# Altium PCB Pioneer V2.0.pcbdoc
Units mil, origin at the board's own origin, x right, y up, seen from the top; angles counter-clockwise.
Board outline 2175 x 1010 mil, 2 copper layers (Top Layer, Bottom Layer); 37 components, 45 nets, 154 pads, 50 vias.
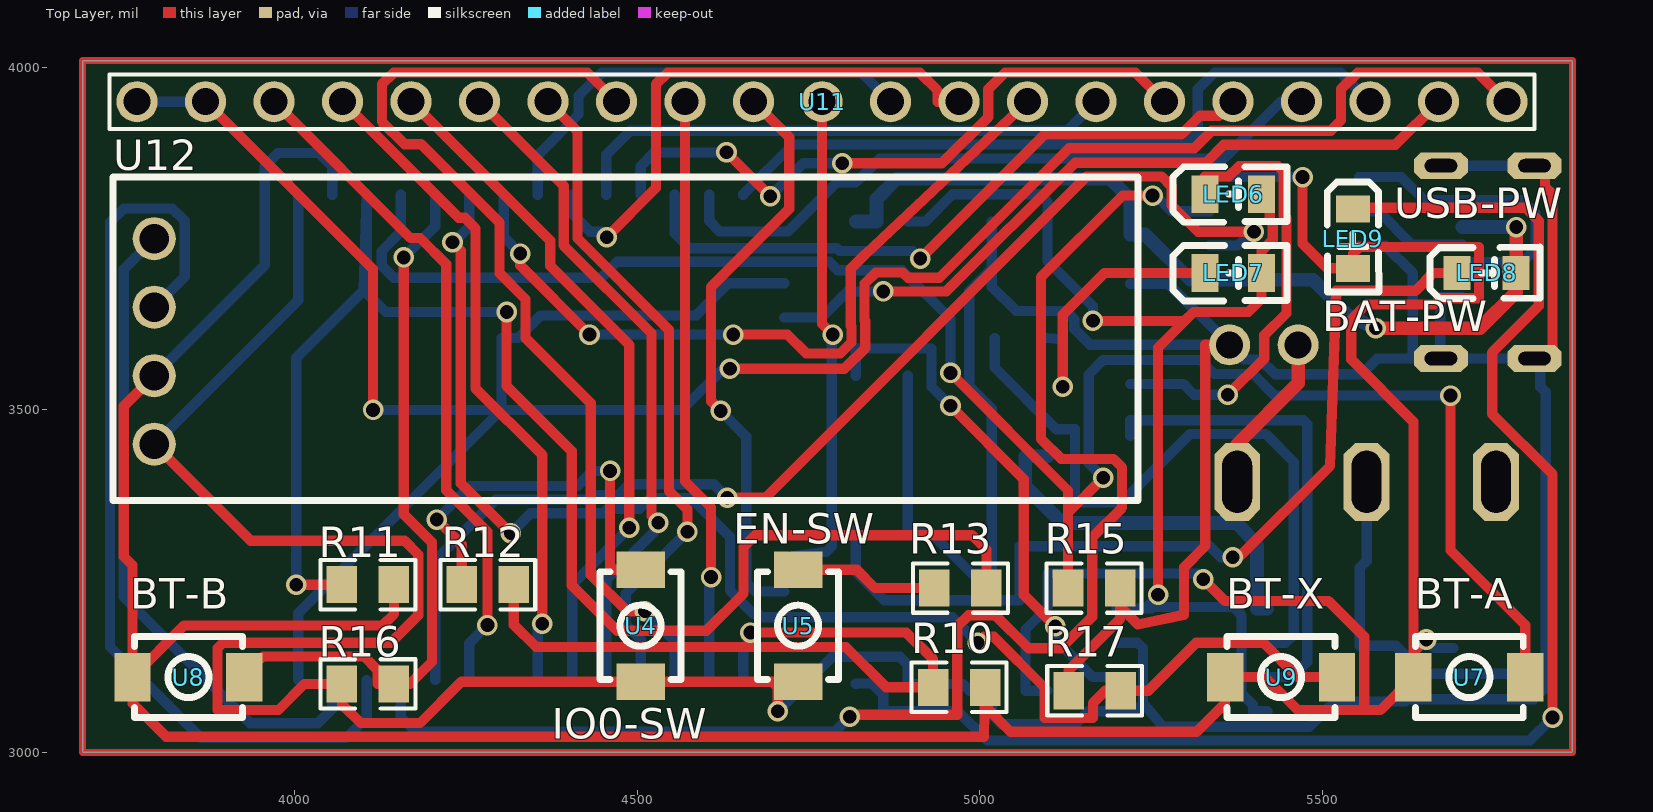
[diagram p0: Top Layer view]
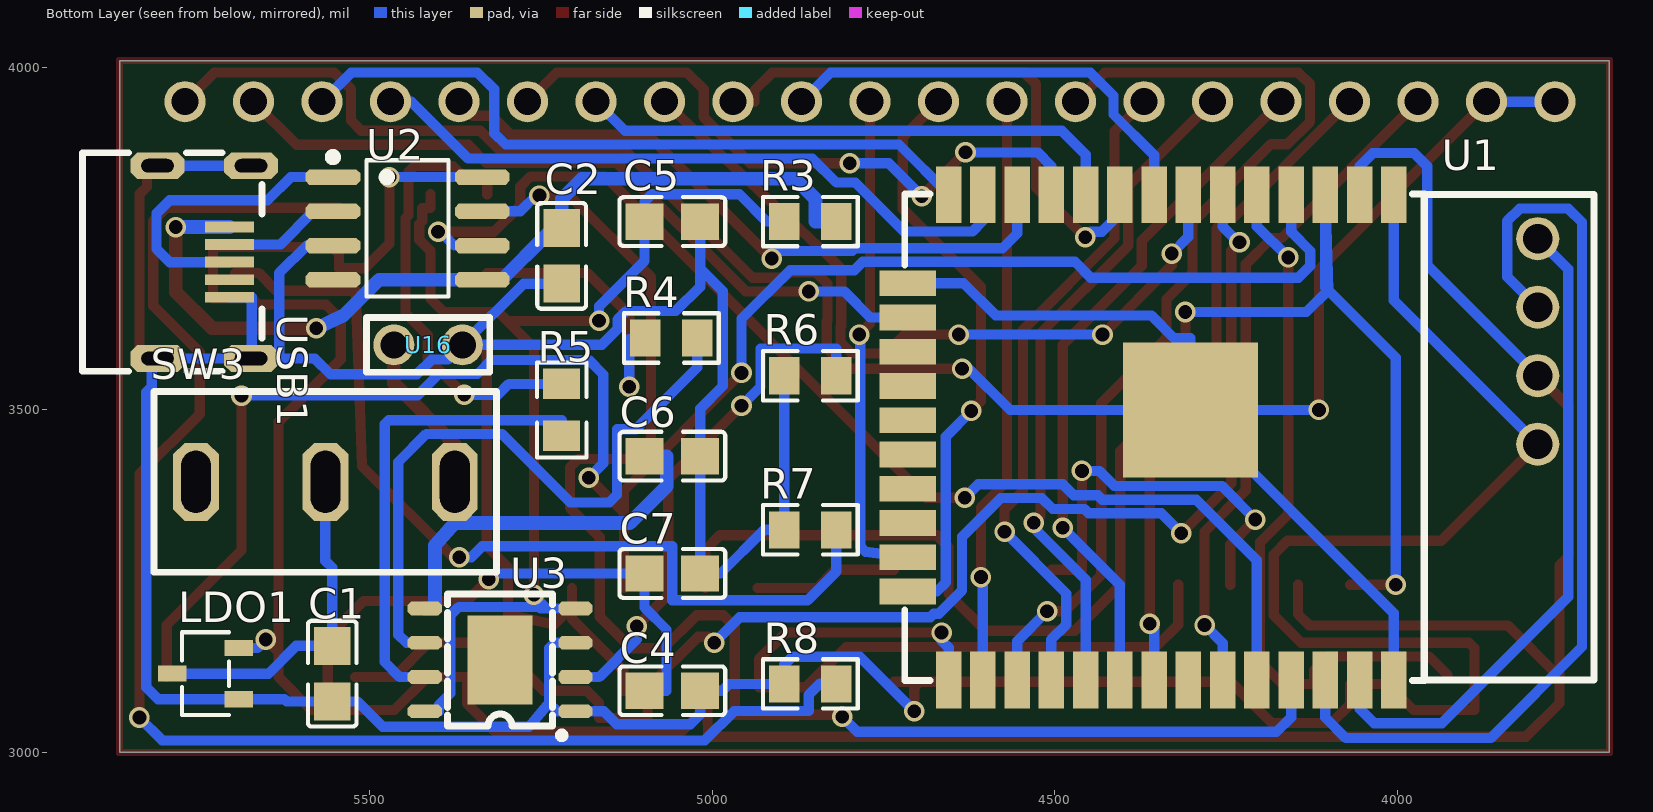
[diagram p1: Bottom Layer view, seen from below]

## Layer stack, top to bottom
Top Solder: solder mask 0.4, Solder Resist, Dk 3.5
Top Layer: signal copper 1.4
Dielectric 1: dielectric 12.6, FR-4, Dk 4.8
Bottom Layer: signal copper 1.4
Bottom Solder: solder mask 0.4, Solder Resist, Dk 3.5

## Board outline
3690,3000 5865,3000 5865,4010 3690,4010

## Design rules (kind name [scope] priority, off if disabled: settings)
Clearance [All] p1: gap=5 ignorepadtopadclearanceinfootprint=FALSE
MinimumSolderMaskSliver [All] p1: minsoldermaskwidth=5
PolygonConnect [All] p1: connectstyle=Relief reliefconductorwidth=10 reliefentries=4 polygonreliefangle="90 Angle" airgapwidth=10
RoutingVias [All] p1: holewidth=20 width=30 viastyle="Through Hole" minholewidth=20 minwidth=30 maxholewidth=20 maxwidth=30
SilkToSilkClearance [All] p1: silktosilkclearance=0
SilkToSolderMaskClearance [IsPad] p1: minsilkscreentomaskgap=1 clearancetoexposedcopper=TRUE
SolderMaskExpansion [All] p1: expansion=4
Width "Power 5" [InNet('5VCC')] p1: maxlimit=20 minlimit=15 preferedwidth=20
Width "Power bat" [InNet('BAT-VCC')] p2: maxlimit=20 minlimit=15 preferedwidth=20
Width "Power 3.3" [InNet('3.3VCC')] p3: maxlimit=15 minlimit=10 preferedwidth=15
Width [All] p4: maxlimit=15 minlimit=10 preferedwidth=15
27 further rules are at their usual default settings.

## Components (designator, comment, footprint, x,y, rotation, side; value= is the part's Value field where it differs from the comment)
C1 "" C0805 5554.55,3115 r90 bottom
C2 "" C0805 5219.55,3725 r270 bottom
C4 "" C0805 5058.04,3090 r180 bottom
C5 "" C0805 5058.04,3775 r180 bottom
C6 "" C0805 5058.04,3432.5 r180 bottom
C7 "" C0805 5058.04,3261.25 r180 bottom
LDO1 "" SOT-23-3_L2.9-W1.6-P1.90-LS2.8-BR 5739.55,3115 r180 bottom
LED6 "" LED0805-R-RD 5369.55,3815 r0 top
LED7 "" LED0805-R-RD 5369.55,3700 r0 top
LED8 "USB-PW" LED0805-RD_RED 5739.55,3700 r0 top
LED9 "BAT-PW" LED0805-RD_RED 5544.55,3750 r270 top
R3 "" R0805 4856.55,3775 r180 bottom
R4 "" R0805 5059.55,3605 r180 bottom
R5 "" R0805 5219.55,3500 r270 bottom
R6 "" R0805 4856.55,3550 r180 bottom
R7 "" R0805 4856.55,3325 r180 bottom
R8 "" R0805 4856.55,3100 r180 bottom
R10 "" R0805 4969.55,3095 r0 top
R11 "" R0805 4106.55,3245 r0 top
R12 "" R0805 4281.55,3245 r0 top
R13 "" R0805 4971.55,3240 r0 top
R15 "" R0805 5166.55,3240 r180 top
R16 "" R0805 4106.55,3100 r0 top
R17 "" R0805 5167.55,3090 r0 top
SW3 "" SW-TH_SHOU-HAN_SS12D10G4 5564.55,3395 r180 bottom
U1 "" WIFIM-SMD_39P-L25.5-W18.0-P1.27-BL 4359.55,3460 r0 bottom
U2 "" SOP-8_L5.0-W4.0-P1.27-LS6.0-BL 5444.55,3765 r270 bottom
U3 "" SOP-8_L4.9-W3.9-P1.27-LS6.0-TL-EP-1 5309.55,3135 r0 bottom
U4 "IO0-SW" SW-SMD_L4.0-W3.0-LS4.8-1 4504.55,3185 r90 top
U5 "EN-SW" SW-SMD_L4.0-W3.0-LS4.8-1 4734.55,3185 r90 top
U7 "BT-A" SW-SMD_L4.0-W3.0-LS4.8-1 5714.55,3110 r180 top
U8 "BT-B" SW-SMD_L4.0-W3.0-LS4.8-1 3844.55,3110 r180 top
U9 "BT-X" SW-SMD_L4.0-W3.0-LS4.8-1 5439.55,3110 r180 top
U11 "" "ESP32 Pioneer OUT PIN20" 3669.55,4065 r0 top
U12 "" ? 3774.55,3670 r0 top
U16 "" "Battery Pin" 5524.55,3555 r90 bottom
USB1 "" MICRO-USB 5741.25,3715.8 r270 bottom

## Footprints (in the part's own frame and the unit in brackets; to place one, negate y for a bottom-side part, rotate by r counter-clockwise, add the part's x,y. Pads: shape width x height; smd on the part's side, far side on the other; paste and mask are expansions set on the pad)
"Battery Pin" [mil]
  round 60 hole 39.37 mask+0: 1(40,-60) 2(40,-160)
  silkscreen extent 0,-200 80,-20
C0805 [mil]
  rect 55.5x53.2 smd mask+2: 1(-40.5,0) 2(40.6,0)
  silkscreen extent -77,-36 77,36
"ESP32 Pioneer OUT PIN20" [mil]
  round 60 hole 39.37 mask+0: 1(100,-115) 2(200,-115) 3(300,-115) 4(400,-115) 5(500,-115) 6(600,-115) 7(700,-115) 8(800,-115) 9(900,-115) 10(1000,-115) 11(1100,-115) 12(1200,-115) 13(1300,-115) 14(1400,-115) 15(1500,-115) 16(1600,-115) 17(1700,-115) 18(1800,-115) 19(1900,-115) 20(2000,-115) 21(2100,-115)
  silkscreen extent 60,-155 2140,-75
LED0805-R-RD [mil]
  rect 39.4x55.1 smd mask+2: 1(41.4,0) 2(-41.3,0)
  silkscreen extent -88,-41 78,40
LED0805-RD_RED [mil]
  rect 39.4x49.2 smd mask+2: 1(-43.3,0) 2(43.3,0)
  silkscreen extent -83,-37 78,38
MICRO-USB [mil]
  oct 39.4x78.7 hole 19.7 slot 47.2 at 90 deg mask+2: 0(-140.7,-68.3) 0(-140.7,68.3) 0(140.8,-68.3) 0(140.8,68.3)
  rect 15.7x70.9 smd mask+2: 1(-51.2,36.8) 2(-25.6,36.8) 3(0,36.8) 4(25.6,36.8) 5(51.2,36.8)
  silkscreen extent -160,-178 159,84
R0805 [mil]
  rect 44.6x54.2 smd mask+2: 1(-38,0) 2(38,0)
  silkscreen extent -69,-36 69,36
SOP-8_L4.9-W3.9-P1.27-LS6.0-TL-EP-1 [mil]
  oct 50x20 smd mask+1.97: 1(-110,75) 2(-110,25) 3(-110,-25) 4(-110,-75) 5(110,-75) 6(110,-25) 7(110,25) 8(110,75)
  rect 94.5x129.9 smd mask+1.97: 9(0,0)
  silkscreen extent -95,-96 77,115
SOP-8_L5.0-W4.0-P1.27-LS6.0-BL [mil]
  oct 22.6x80.1 smd mask+2: 1(-75,-109) 2(-25,-109) 3(25,-109) 4(75,-109) 5(75,109) 6(25,109) 7(-25,109) 8(-75,109)
  silkscreen extent -110,-115 100,60
SOT-23-3_L2.9-W1.6-P1.90-LS2.8-BR [mil]
  rect 42.1x23.6 smd mask+2: 1(48.6,-37.4) 2(48.6,37.4) 3(-48.6,0)
  silkscreen extent -35,-61 35,61
SW-SMD_L4.0-W3.0-LS4.8-1 [mil]
  rect 53.2x70.9 smd mask+2: 1(-81.7,0) 2(81.7,0)
  silkscreen extent -79,-59 79,59
SW-TH_SHOU-HAN_SS12D10G4 [mil]
  oct 66.9x114.2 hole 43.3 slot 90.6 at 90 deg mask+1.97: 1(-189,0) 2(0,0) 3(189,0)
  silkscreen extent -250,-132 250,132
WIFIM-SMD_39P-L25.5-W18.0-P1.27-BL [mil]
  rect 37.4x82.7 smd mask+2: 1(-354.9,-354.3) 2(-304.9,-354.3) 3(-254.9,-354.3) 4(-204.9,-354.3) 5(-154.9,-354.3) 6(-104.9,-354.3) 7(-54.9,-354.3) 8(-4.9,-354.3) 9(45.1,-354.3) 10(95.1,-354.3) 11(145.1,-354.3) 12(195.1,-354.3) 13(245.1,-354.3) 14(295.1,-354.3) 25(295.1,354.3) 26(245.1,354.3) 27(195.1,354.3) 28(145.1,354.3) 29(95.1,354.3) 30(45.1,354.3) 31(-4.9,354.3) 32(-54.9,354.3) 33(-104.9,354.3) 34(-154.9,354.3) 35(-204.9,354.3) 36(-254.9,354.3) 37(-304.9,354.3) 38(-354.9,354.3)
  rect 82.7x37.4 smd mask+2: 15(354.9,-225) 16(354.9,-175) 17(354.9,-125) 18(354.9,-75) 19(354.9,-25) 20(354.9,25) 21(354.9,75) 22(354.9,125) 23(354.9,175) 24(354.9,225)
  rect 196.9x196.9 smd mask+2: 39(-58,-40)
  silkscreen extent -647,-355 359,355
? [mm]
  round 1.6 hole 1.1 mask+0: 1(0.508,2.032) 2(0.508,-0.508) 3(0.508,-3.048) 4(0.508,-5.588)
  silkscreen extent -1.02,-7.68 36.98,4.32

## Via types
v1: diameter 30, hole 20, Top Layer to Bottom Layer, 50 vias

## Nets (pads, with @x,y where several pads share a name; then routed paths per layer and width w, separated by ;. In a path a pad name is that pad's centre, name@x,y a point inside that pad or via, vN(x,y) a via of type N, cw(c..) or ccw(c..) an arc to the next point about the centre after c; other vN are vias at no path point)
3.3VCC: C4.1 C7.1 LDO1.2 LED9.2 R10.2 R11.2 U1.2 U2.8 U7.2 U8.2 U9.2 U12.3 | length 5852.1
  Top Layer w15: U12.3 3750,3505.45 3750,3286 3762.85,3273.15 U8.2 ; R11.2 4144.55,3201.95 4128,3185.4 3838.25,3185.4 U8.2 ; v1(5326,3253) 5358,3221 5509,3221 5561,3169 5561,3062 ; v1(5471,3840) 5471,3742.7 5507,3706.7 LED9.2 5544.55,3728 5554.55,3738 5728.45,3738 5728.45,3662.9 5671.9,3662.9 5663,3654 5564,3654 5542,3632 5542,3573.85 5632.85,3483 5632.85,3146.15 ; v1(5651.55,3164.85) 5632.85,3146.15 ; U8.2 3762.85,3072 3811.85,3023 5006.05,3023 R10.2 5007.55,3067.45 5044.6,3030.4 5316.25,3030.4 5357.85,3072 U9.2 5416,3110 5464,3062 5561,3062 ; 5561,3062 5584.85,3062 U7.2 5632.85,3146.15
  Bottom Layer w15: U12.3 3956,3711.45 3956,3856 3975,3875 4035.65,3875 4054.65,3856 U1.2 ; C4.1 5066.5,3090 5066.5,3179.46 5098.54,3211.5 C7.1 5317.75,3261.25 v1(5326,3253) ; U2.8 v1(5471,3840) ; v1(5651.55,3164.85) 5664,3152.4 LDO1.2
5VCC: C2.1 LED8.2 R3.2 U2.5 USB1.1 | length 1321.7
  Top Layer w20: v1(5577.65,3619.45) 5730,3619.45 5782.85,3672.3 LED8.2 v1(5782.85,3767)
  Bottom Layer w20: R3.2 4849,3775 4849,3808 4878.5,3837.5 5190.05,3837.5 5219.55,3808 C2.1 5219.55,3756 5241,3756 5307,3690 U2.5 5486,3690 5537.65,3638.35 v1(5577.65,3619.45) ; USB1.1 v1(5782.85,3767)
#EN: R11.1 R13.2 U1.3 | length 2273.3
  Top Layer w15: v1(4002,3245) R11.1 ; v1(4309,3643) 4309,3534.88 4404,3439.88 4404,3243.89 4470.24,3177.65 4600.65,3177.65 4655,3232 4655,3300 4672,3317 4988.55,3317 5009.55,3296 R13.2
  Bottom Layer w15: v1(4002,3245) 4002,3576.35 4100.49,3674.84 ; v1(4309,3643) 4132.34,3643 4100.49,3674.84 ; 4100.49,3674.84 4104.65,3679 U1.3 4100.49,3674.84
$1N895: U2.2 USB1.2 | length 171
  Bottom Layer w15: U2.2 5582,3790 5630.6,3741.4 USB1.2
$1N898: U2.1 USB1.3 | length 446
  Bottom Layer w15: U2.1 5615,3840 5649,3806 5792,3806 5811,3787 5811,3734.8 5792,3715.8 USB1.3
$1N3593: C1.2 LDO1.3 SW3.2 | length 494
  Bottom Layer w15: SW3.2 5564.55,3280 5554.55,3270 C1.2 5607,3155.6 5647.6,3115 LDO1.3
$1N4478: C5.1 LED6.1 LED7.1 R3.1 U3.4 U3.8 | length 1679.1
  Top Layer w15: v1(5165,3630) 5299,3630 5312,3643 ; v1(5260,3230) 5260,3591 5312,3643 ; LED6.1 5410.95,3794.91 5423.1,3794.91 5423.1,3775.79 5427.5,3771.39 5427.5,3748.61 5411.39,3732.5 5410.95,3732.5 LED7.1 5410.95,3661.95 5392,3643 5312,3643
  Bottom Layer w15: R3.1 4920,3775 4960,3815 5088,3815 5098.54,3804.46 C5.1 5098.54,3717.96 5165,3651.5 v1(5165,3630) ; U3.4 5241,3210 ; v1(5260,3230) 5260,3229 5241,3210 ; U3.8 5398.52,3060 5398.52,3069.48 5382,3086 5382,3200 5369.55,3212.45 5252.45,3212.45 5250,3210 5241,3210
$1N5919: R4.2 U3.6 | length 971.1
  Bottom Layer w15: R4.2 5021.55,3562 5111.55,3472 5138.79,3472 5138.79,3376 5149.79,3365 5207,3365 5307,3465 5417,3465 5458,3424 5458,3172 5446,3160 U3.6
$1N6247: R6.2 U3.2 | length 762.2
  Top Layer w15: v1(4957,3506) 5064,3399 5064,3230 v1(5110,3184)
  Bottom Layer w15: R6.2 4818.55,3589.6 4929.35,3589.6 4929.35,3533.65 v1(4957,3506) ; v1(5110,3184) 5110,3165 5165,3110 U3.2
$1N9796: R12.1 U4.2 | length 581.4
  Top Layer w15: v1(4207,3340) 4243.55,3303.45 R12.1 ; v1(4460,3411) 4460,3266.7 U4.2
  Bottom Layer w15: v1(4207,3340) 4256.05,3389.05 4413,3389.05 4434.95,3411 v1(4460,3411)
$1N9811: R13.1 U5.2 | length 210.1
  Top Layer w15: U5.2 4820,3266.7 4846.7,3240 R13.1
$1N11743: LED9.1 R8.2 | length 2151
  Top Layer w15: LED9.1 5544.55,3795 5797,3795 5816,3776 5816,3652 5748,3584 5748,3494 5836,3406 v1(5836,3051)
  Bottom Layer w15: R8.2 4818.55,3100.73 4842.27,3100.73 4859,3084 4859,3060.4 4967.6,3060.4 5010.5,3017.5 5802.5,3017.5 v1(5836,3051)
$1N11760: LED6.2 R5.1 | length 662.7
  Top Layer w15: LED6.2 5328.25,3840.89 5363.28,3840.89 5378.39,3856 5435.15,3856 5443.15,3848 5443.15,3784.03 5447.5,3779.68 5447.5,3641.35 5415,3608.85 5415,3575 v1(5362,3522)
  Bottom Layer w15: R5.1 5296.55,3538 5312.55,3522 v1(5362,3522)
$1N11761: LED7.2 R4.1 | length 430.3
  Top Layer w15: v1(5121,3534) 5121,3639 5182,3700 LED7.2
  Bottom Layer w15: R4.1 5121,3603.25 v1(5121,3534)
$1N12000: R5.2 U3.7 | length 698.5
  Bottom Layer w15: R5.2 5219.55,3485 5472,3485 5478,3479 5478,3132 5456,3110 U3.7
$1N12034: LED8.1 R7.2 | length 1354.7
  Top Layer w15: v1(5369,3285) 5378,3285 5511,3418 5520,3674 5636,3674 5662,3700 LED8.1
  Bottom Layer w15: R7.2 4818.55,3264 4860.55,3222 5058,3222 5058,3301 5335.35,3301 5351.35,3285 v1(5369,3285)
BAT-VCC: C6.1 SW3.3 U3.5 U16.1 | length 855.9
  Top Layer w20: SW3.3 5375.55,3450 5464.55,3539 U16.1
  Bottom Layer w20: C6.1 5066,3432.5 5066,3389 5120,3335 5375.55,3335 ; SW3.3 5375.55,3335 ; U3.5 5404.55,3210 5404.55,3302.6 5375.55,3335
BUTTON1: R15.2 U1.4 U7.1 | length 2708.3
  Top Layer w15: v1(4957,3554) 5128.55,3382.45 5128.55,3349.55 ; R15.2 5128.55,3349.55 ; v1(5180,3401) 5128.55,3349.55 ; v1(5687,3521) 5687,3295.25 5796.25,3186 U7.1
  Bottom Layer w15: U1.4 4154.65,3760 4126.66,3732.01 4126.66,3710.34 4144,3693 4447,3693 4470.2,3716.2 4780,3716.2 4792.2,3704 4886,3704 4957,3633 v1(4957,3554) ; v1(5180,3401) 5158.79,3422.21 5158.79,3551.79 5180,3573 5322,3573 5342.5,3552.5 5399,3552.5 5430.5,3521 v1(5687,3521)
BUTTON2: R16.2 U1.5 U8.1 | length 1047.7
  Top Layer w15: U8.1 3926.25,3113 3953.25,3140 4101,3140 4121,3120 4121,3100 R16.2 4168,3100 4200,3132 4200,3306.88 4159,3347.88 v1(4159,3722.66)
  Bottom Layer w15: v1(4159,3722.66) 4204.65,3768.31 U1.5
BUTTON3: R17.2 U1.6 U9.1 | length 2059.3
  Top Layer w15: v1(4230,3745) 4242.25,3732.75 4242.25,3392.75 v1(4315,3320) ; v1(4997,3160) 5005.8,3168.8 5020.2,3168.8 5094.2,3094.8 5094.2,3050.4 5165,3050.4 5165,3072 5183,3090 R17.2 5246,3090 5316,3160 5414,3160 5464,3110 U9.1
  Bottom Layer w15: v1(4230,3745) 4232,3745 4254.65,3767.65 U1.6 ; v1(4315,3320) 4344.05,3349.05 4450.27,3349.05 4456.72,3355.5 4503,3355.5 4518.85,3371.35 4578.65,3371.35 4635,3315 4635,3236.72 4669.22,3202.5 4676.39,3202.5 4681.39,3197.5 4959.5,3197.5 v1(4997,3160)
ESP-RXD: U1.34 U2.6 | length 1740.8
  Top Layer w15: v1(4631,3372) 4687,3372 5155.89,3840.89 5265.11,3840.89 5280,3826 5280,3798.32 5318.32,3760 v1(5400,3760)
  Bottom Layer w15: U1.34 4204.65,3280.65 4293.05,3369.05 4430.27,3369.05 4436.72,3375.5 4472.15,3375.5 4488,3391.35 4611.65,3391.35 v1(4631,3372) ; U2.6 5376,3740 5396,3760 v1(5400,3760)
ESP-TXD: U1.35 U2.7 | length 2170.8
  Top Layer w15: v1(4810,3052) 4813,3055 4967,3055 4967,3184 4983.4,3200.4 5022.55,3200.4 5070.95,3152 5118,3152 5164,3198 5164,3314 5207.5,3357.5 5207.5,3416 5195,3428.5 5118.5,3428.5 5089,3458 5089,3693.58 5208.42,3813 v1(5252,3813)
  Bottom Layer w15: U1.35 4154.65,3051.35 4176,3030 4788,3030 v1(4810,3052) ; v1(5252,3813) 5257,3813 5280,3790 U2.7
GND: C1.1 C2.2 C4.2 C5.2 C6.2 C7.2 LDO1.1 R6.1 R7.1 R8.1 R15.1 R16.1 R17.1 U1.1 U2.3 U3.1 U3.3 U4.1 U5.1 U12.4 U16.2 USB1.0 USB1.5 | length 7790.7
  Top Layer w15: U12.4 3935.55,3309 4160,3309 4180,3289 4180,3200 4140,3160 3895,3160 3887,3152 3887,3062 3976,3062 4014,3100 R16.1 4068.55,3070.45 4096,3043 4182.7,3043 4243,3103.3 U4.1 4697,3103.3 ; v1(4705,3060) 4705,3095.3 4697,3103.3 ; U5.1 4697,3103.3 ; R17.1 5129.55,3120 5204.55,3195 R15.1@5204.55,3213 ; R15.1 R15.1@5204.55,3213 ; U16.2 5329,3595 5329,3301.37 5298,3270.37 5298,3201 5230.55,3187 R15.1@5204.55,3213 ; USB1.0@5809.55,3575 5836,3575 5836,3815 5825,3826 5825,3856.5 USB1.0@5809.55,3856.5
  Bottom Layer w15: U12.4 4004.65,3660.1 U1.1 ; v1(4705,3060) 4784.6,3139.6 4882.95,3139.6 4894.55,3128 R8.1 4975,3100 4985,3090 C4.2 5017.44,3055.56 5032,3041 5139,3041 5158,3060 U3.1 5226,3060 5238,3072 ; R6.1 R7.1 4924,3325 4987.75,3261.25 C7.2 C6.2 5017.44,3502 4984.5,3534.94 4984.5,3673.5 5017.44,3706.44 ; C5.2 5017.44,3706.44 ; U3.3 5230,3160 5238,3152 5238,3072 ; C2.2 5275.15,3684.4 U16.2 ; U2.3 5592,3740 5632,3700 5632,3575 ; USB1.0@5672.95,3856.5 USB1.0@5809.55,3856.5 ; USB1.5 5672,3664.6 USB1.0@5672,3575 ; 5017.44,3706.44 5017.44,3680 5052.84,3644.6 5125.03,3644.6 5137.5,3632.13 5137.5,3618.61 5161.11,3595 U16.2 ; 5238,3072 5267.5,3037.5 5481,3037.5 5518,3074.5 C1.1 5621,3074.5 5624.1,3077.6 LDO1.1 5808.6,3077.6 5826,3095 5826,3526 5818,3534 5818,3575 5809.55,3575 5672.95,3575 USB1.0@5672,3575 ; U16.2 5386.03,3573.52 5409.5,3573.52 5431.02,3552 5557,3552 5580,3575 5632,3575 ; 5632,3575 USB1.0@5672,3575
IO0: R10.1 R12.2 U1.25 | length 1105.8
  Top Layer w15: R12.2 4319.55,3186.36 4352,3153.91 4804.09,3153.91 4863,3095 R10.1 4931.55,3136 4892.55,3175 v1(4665,3175)
  Bottom Layer w15: U1.25 4654.65,3152.65 4665,3163 v1(4665,3175)
IO2: U1.24 U11.10 | length 852.9
  Top Layer w15: v1(4621.5,3498.5) 4607.5,3512.5 4607.5,3679.59 4721.5,3793.59 4721.5,3898.05 U11.10
  Bottom Layer w15: v1(4621.5,3498.5) 4659,3461 4659,3248 4672,3235 U1.24
IO4: U1.26 U11.9 | length 861.2
  Top Layer w15: U11.9 4569.55,3395.59 4607.5,3357.64 v1(4607.5,3256)
  Bottom Layer w15: U1.26 4604.65,3253.15 v1(4607.5,3256)
IO5: U1.29 U11.6 | length 983.8
  Top Layer w15: U11.6 4392.53,3827.02 4392.53,3739.93 4520.5,3611.96 4520.5,3345.23 v1(4530.5,3335.23)
  Bottom Layer w15: U1.29 4454.65,3252.15 4530.5,3328 v1(4530.5,3335.23)
IO12: U1.14 U11.19 | length 1044.2
  Bottom Layer w15: U1.14 4654.65,3815 4727.15,3887.5 5301.5,3887.5 5318,3904 5318,3968 5342.5,3992.5 5527.05,3992.5 U11.19
IO13: U1.16 U11.20 | length 1085.6
  Top Layer w15: v1(4859,3673) 4951,3673 5139,3861 5330,3861 5356,3887 5606.55,3887 U11.20
  Bottom Layer w15: U1.16 4769,3635 4807,3673 v1(4859,3673)
IO14: U1.13 U11.18 | length 988.2
  Bottom Layer w15: U1.13 4604.65,3776 4620.3,3760.35 4719.35,3760.35 4791,3832 4818.5,3832 4853.5,3867 5356,3867 5439,3950 U11.18
IO15: U1.23 U11.11 | length 729.2
  Top Layer w15: U11.11 4769.55,3625.45 v1(4785,3610)
  Bottom Layer w15: U1.23 4776,3293 4783.75,3300.75 4783.75,3608.75 v1(4785,3610)
IO16: U1.27 U11.8 | length 1443.5
  Top Layer w15: U11.8 4427.05,3992.5 4144,3992.5 4127,3975.5 4127,3921 4160,3888 4184.16,3888 4298.75,3773.41 4298.75,3699.75 4336.5,3662 4336.5,3605.5 4432,3510 4432,3259 4485,3206 v1(4511,3206)
  Bottom Layer w15: v1(4511,3206) 4554.65,3162.35 U1.27
IO17: U1.28 U11.7 | length 974.8
  Top Layer w15: U11.7 4412.53,3907.02 4412.53,3750.47 4546,3617 4546,3382 4573,3355 v1(4573,3322)
  Bottom Layer w15: U1.28 4504.65,3165 4483,3186.65 4483,3232 v1(4573,3322)
IO18: U1.30 U11.5 | length 1010.7
  Top Layer w15: U11.5 4372.53,3747.02 4372.53,3710.35 4488,3594.88 v1(4488,3328)
  Bottom Layer w15: U1.30 4404.65,3244.65 v1(4488,3328)
IO19: U1.31 U11.4 | length 972.9
  Top Layer w15: U11.4 4239.05,3780.5 4248,3780.5 4263.49,3765.01 4263.49,3531.82 4361,3434.31 v1(4361,3188)
  Bottom Layer w15: U1.31 4354.65,3181.65 v1(4361,3188)
IO21: U1.33 U11.3 | length 992.4
  Top Layer w15: U11.3 4168.55,3751 4182.5,3751 4221,3712.5 4221,3382.55 4281,3322.55 v1(4281,3186)
  Bottom Layer w15: U1.33 4254.65,3159.65 v1(4281,3186)
IO25: U1.10 U11.15 | length 805.3
  Bottom Layer w15: U1.10 4454.65,3872.65 4489.5,3907.5 5127.05,3907.5 U11.15
IO26: U1.11 U11.16 | length 957.5
  Top Layer w15: v1(4630,3876) v1(4694,3812) ; v1(4799,3860) 4944.5,3860 5012.05,3927.55 5012.05,3968 5036.55,3992.5 5227.05,3992.5 U11.16
  Bottom Layer w15: U1.11 4504.65,3856 4524.65,3876 v1(4630,3876) ; v1(4694,3812) 4742,3860 v1(4799,3860)
IO27: U1.12 U11.17 | length 981.6
  Top Layer w15: v1(4913,3721) 5094,3902 5293.9,3902 5321.23,3929.34 5348.89,3929.34 U11.17
  Bottom Layer w15: U1.12 4554.65,3757.55 4576,3736.2 4791.29,3736.2 4795.44,3732.05 4901.95,3732.05 v1(4913,3721)
IO32: U1.8 U11.12 | length 656
  Bottom Layer w15: U1.8 4354.65,3872 4414,3931.35 4414,3958.5 4448,3992.5 4827.05,3992.5 U11.12
IO33: U1.9 U11.13 | length 822.7
  Top Layer w15: v1(4455,3752) 4527,3824 4527,3975.5 4544,3992.5 4912,3992.5 4938,3966.5 4938,3950 U11.13
  Bottom Layer w15: U1.9 4404.65,3786.35 4431,3760 4447,3760 v1(4455,3752)
IO35: U1.7 U11.14 | length 1119.7
  Top Layer w15: v1(4329.03,3728.35) 4329.03,3710.97 v1(4430,3610) ; v1(4640,3610) 4719.1,3610 4746.6,3582.5 4796.39,3582.5 4812.5,3598.61 4812.5,3621.39 4811.5,3622.39 4811.5,3706 4832,3726.5 U11.14
  Bottom Layer w15: U1.7 4304.65,3752.73 v1(4329.03,3728.35) ; v1(4430,3610) v1(4640,3610)
IOGND: U1.15 U1.38 U1.39 U11.1 U11.2 U11.21 | length 3686.1
  Top Layer w15: U11.2 4114,3705.55 v1(4114,3500) ; v1(4635,3560) 4802.18,3560 4832.5,3590.32 4832.5,3629.68 4831.5,3630.68 4831.5,3684.39 4847.61,3700.5 4887.5,3700.5 4895,3693 4941,3693 5130,3882 5313.11,3882 5338.61,3907.5 5512,3907.5 5527,3922.5 5527,3968 5551.5,3992.5 5727.05,3992.5 U11.21
  Bottom Layer w15: U11.1 U11.2 ; U1.38 4004.65,3203.1 U1.39 ; v1(4114,3500) U1.39 ; v1(4635,3560) 4625,3560 4565,3500 U1.39 ; U1.15 4633,3685 4586,3638 4359,3638 4326.05,3605.05 4301.55,3605.05 U1.39
SCL: U1.36 U12.2 | length 1386
  Bottom Layer w15: U12.2 3839,3694.45 3839,3776 3821,3794 3750,3794 3730,3774 3730,3154 3863,3021 4074.65,3021 4104.65,3051 U1.36
SDA: U1.37 U12.1 | length 973.3
  Bottom Layer w15: U12.1 3750,3705.45 3750,3227 3934.47,3042.53 4033.53,3042.53 4054.65,3063.65 U1.37
pads on no net: SW3.1 U1.17 U1.18 U1.19 U1.20 U1.21 U1.22 U1.32 U2.4 U3.9 USB1.4
copper on no net: | length 6370
  Top Layer w10: 3690,3000 3690,4010 5865,4010 5865,3000 3690,3000

## Silkscreen, mask and mechanical layers (free items; w line width, h text height)
Mechanical 6:
  text "2175 (mil)" at 3689.55,4080 h60
  text "2175 (mil)" at 4511.13,4044.01 h60
  text "1010 (mil)" at 3535.54,3244.08 h60 r90
  text "1010 (mil)" at 3535.54,3244.08 h60 r90